# Altium PCB EMIA_HM1521_NETLIST_V1.0.pcbdoc (part 1 of 2)
Units mm, origin at the board's own origin, x right, y up, seen from the top; angles counter-clockwise.
Board outline 118 x 84.09 mm, 2 copper layers (Top Layer, Bottom Layer), stack 0.972 mm thick; 201 components, 147 nets, 642 pads, 379 vias.
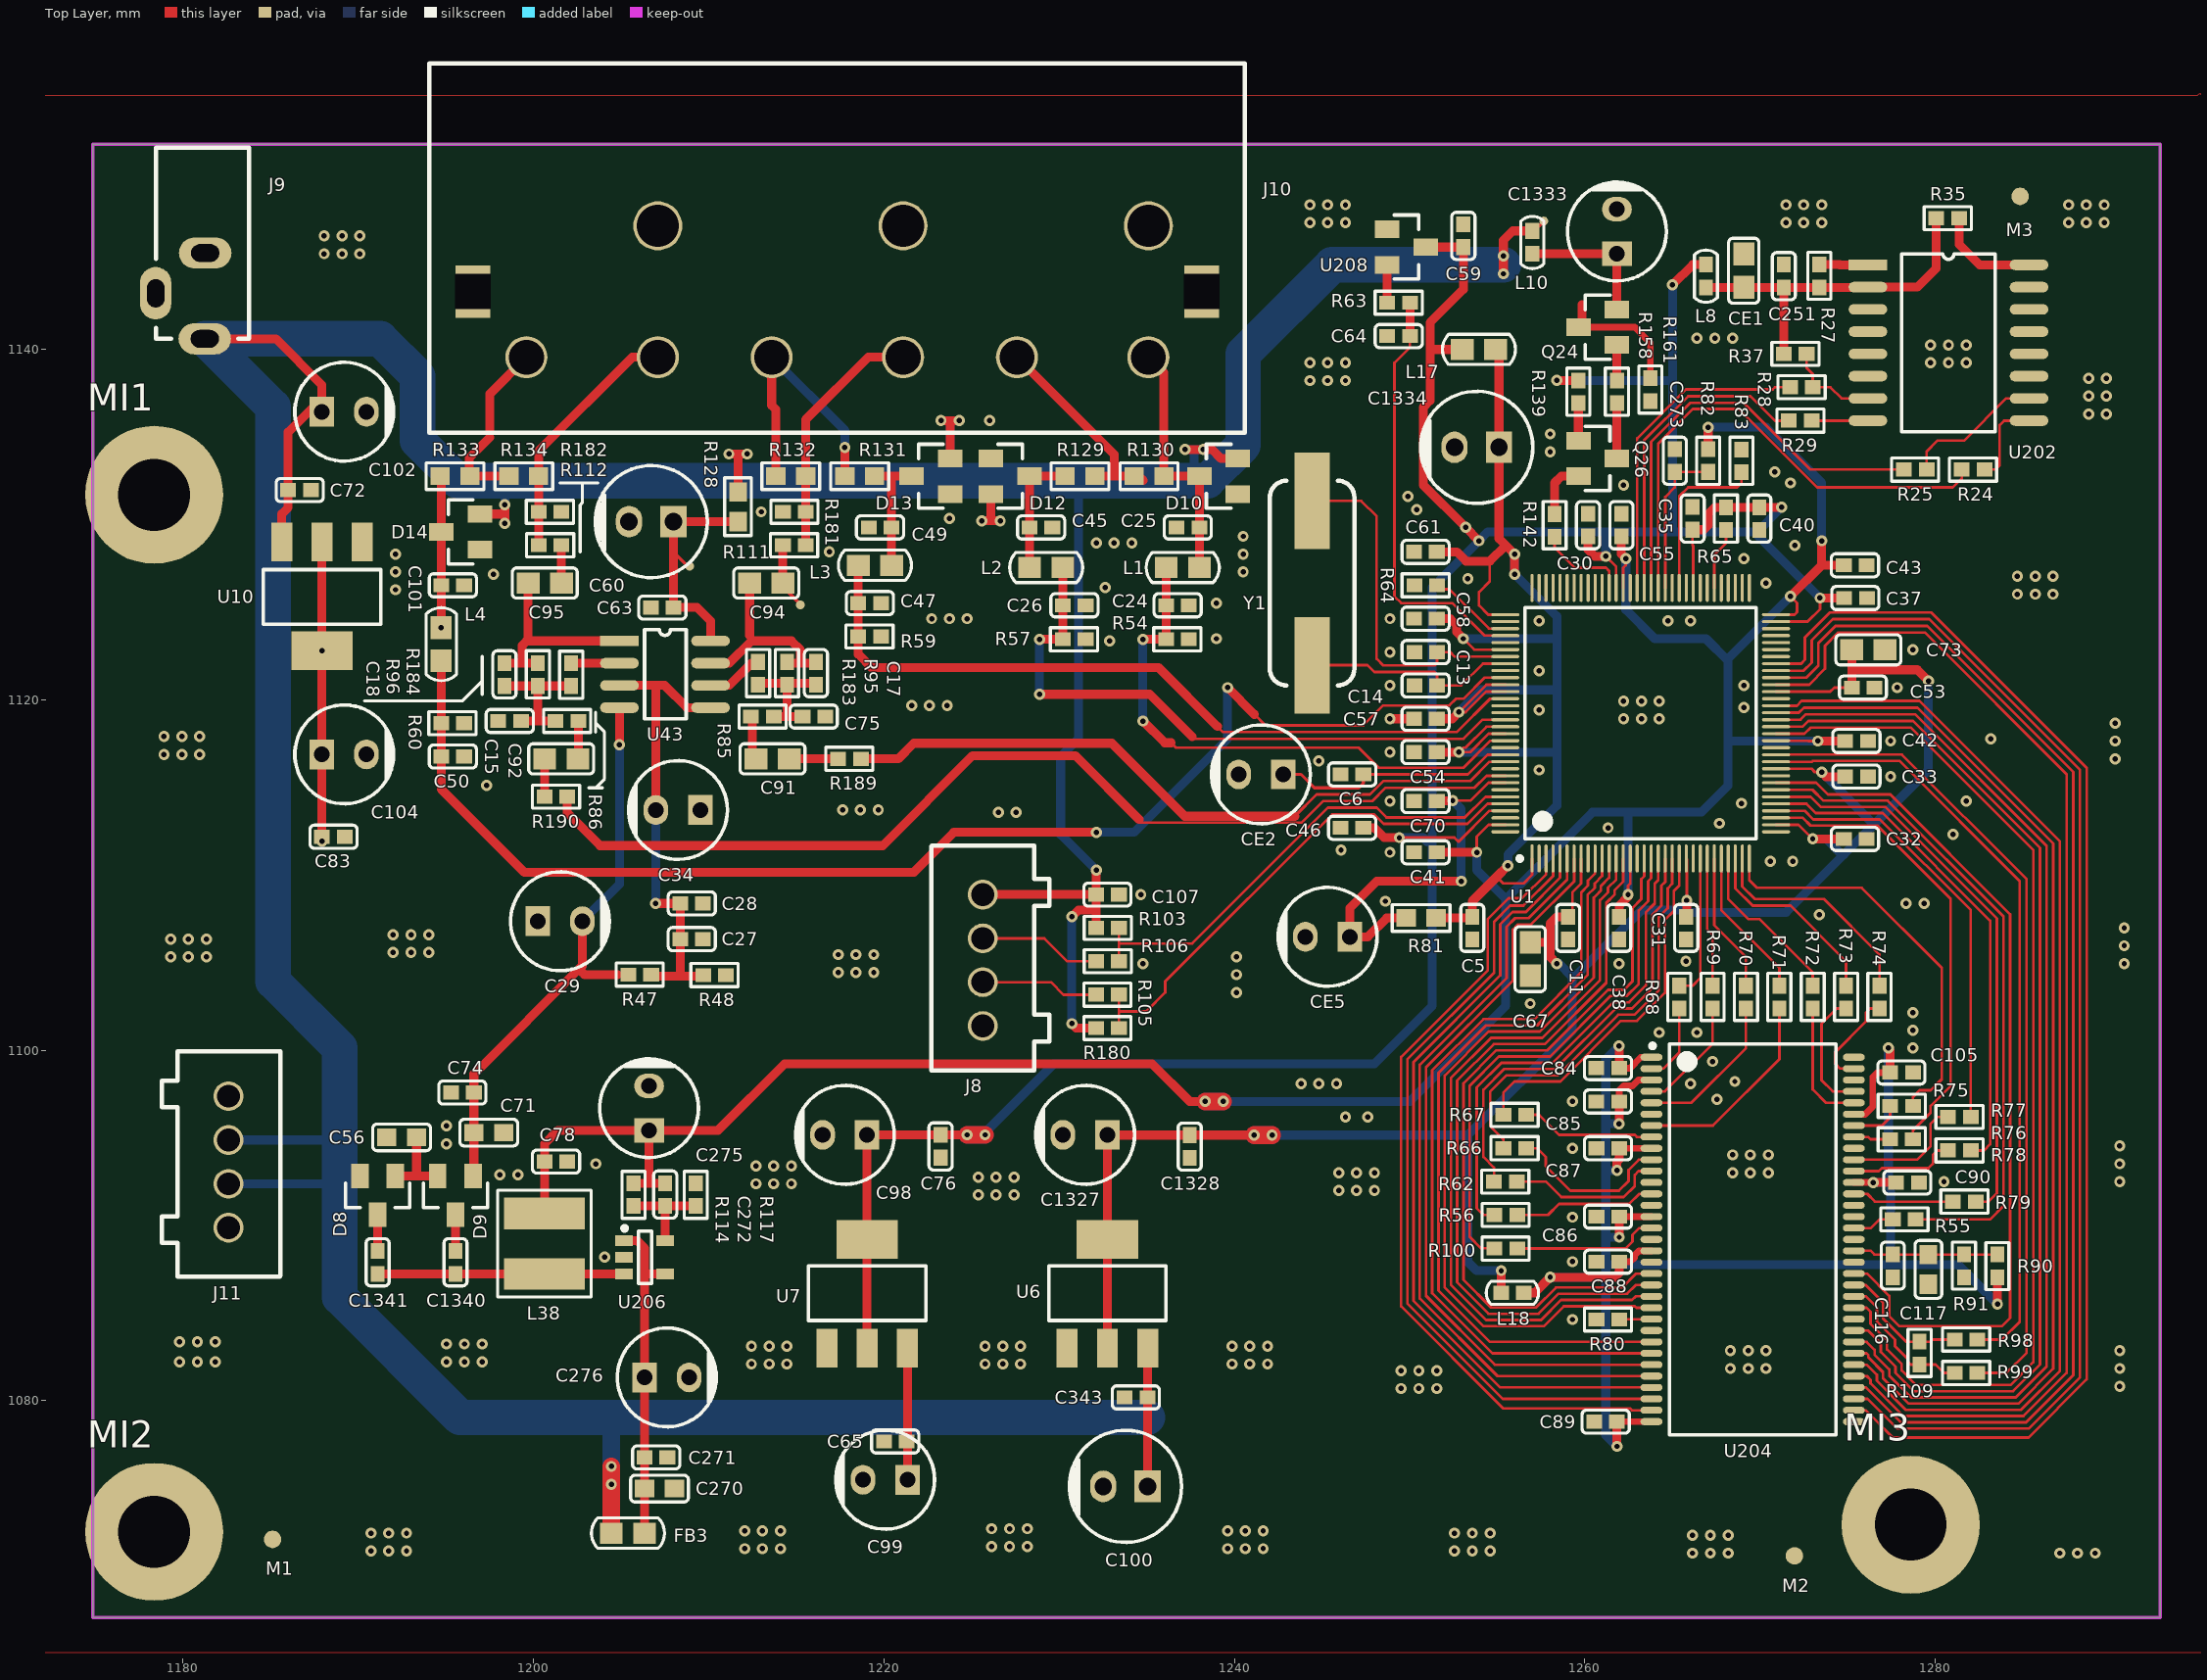
[diagram p0: Top Layer view]
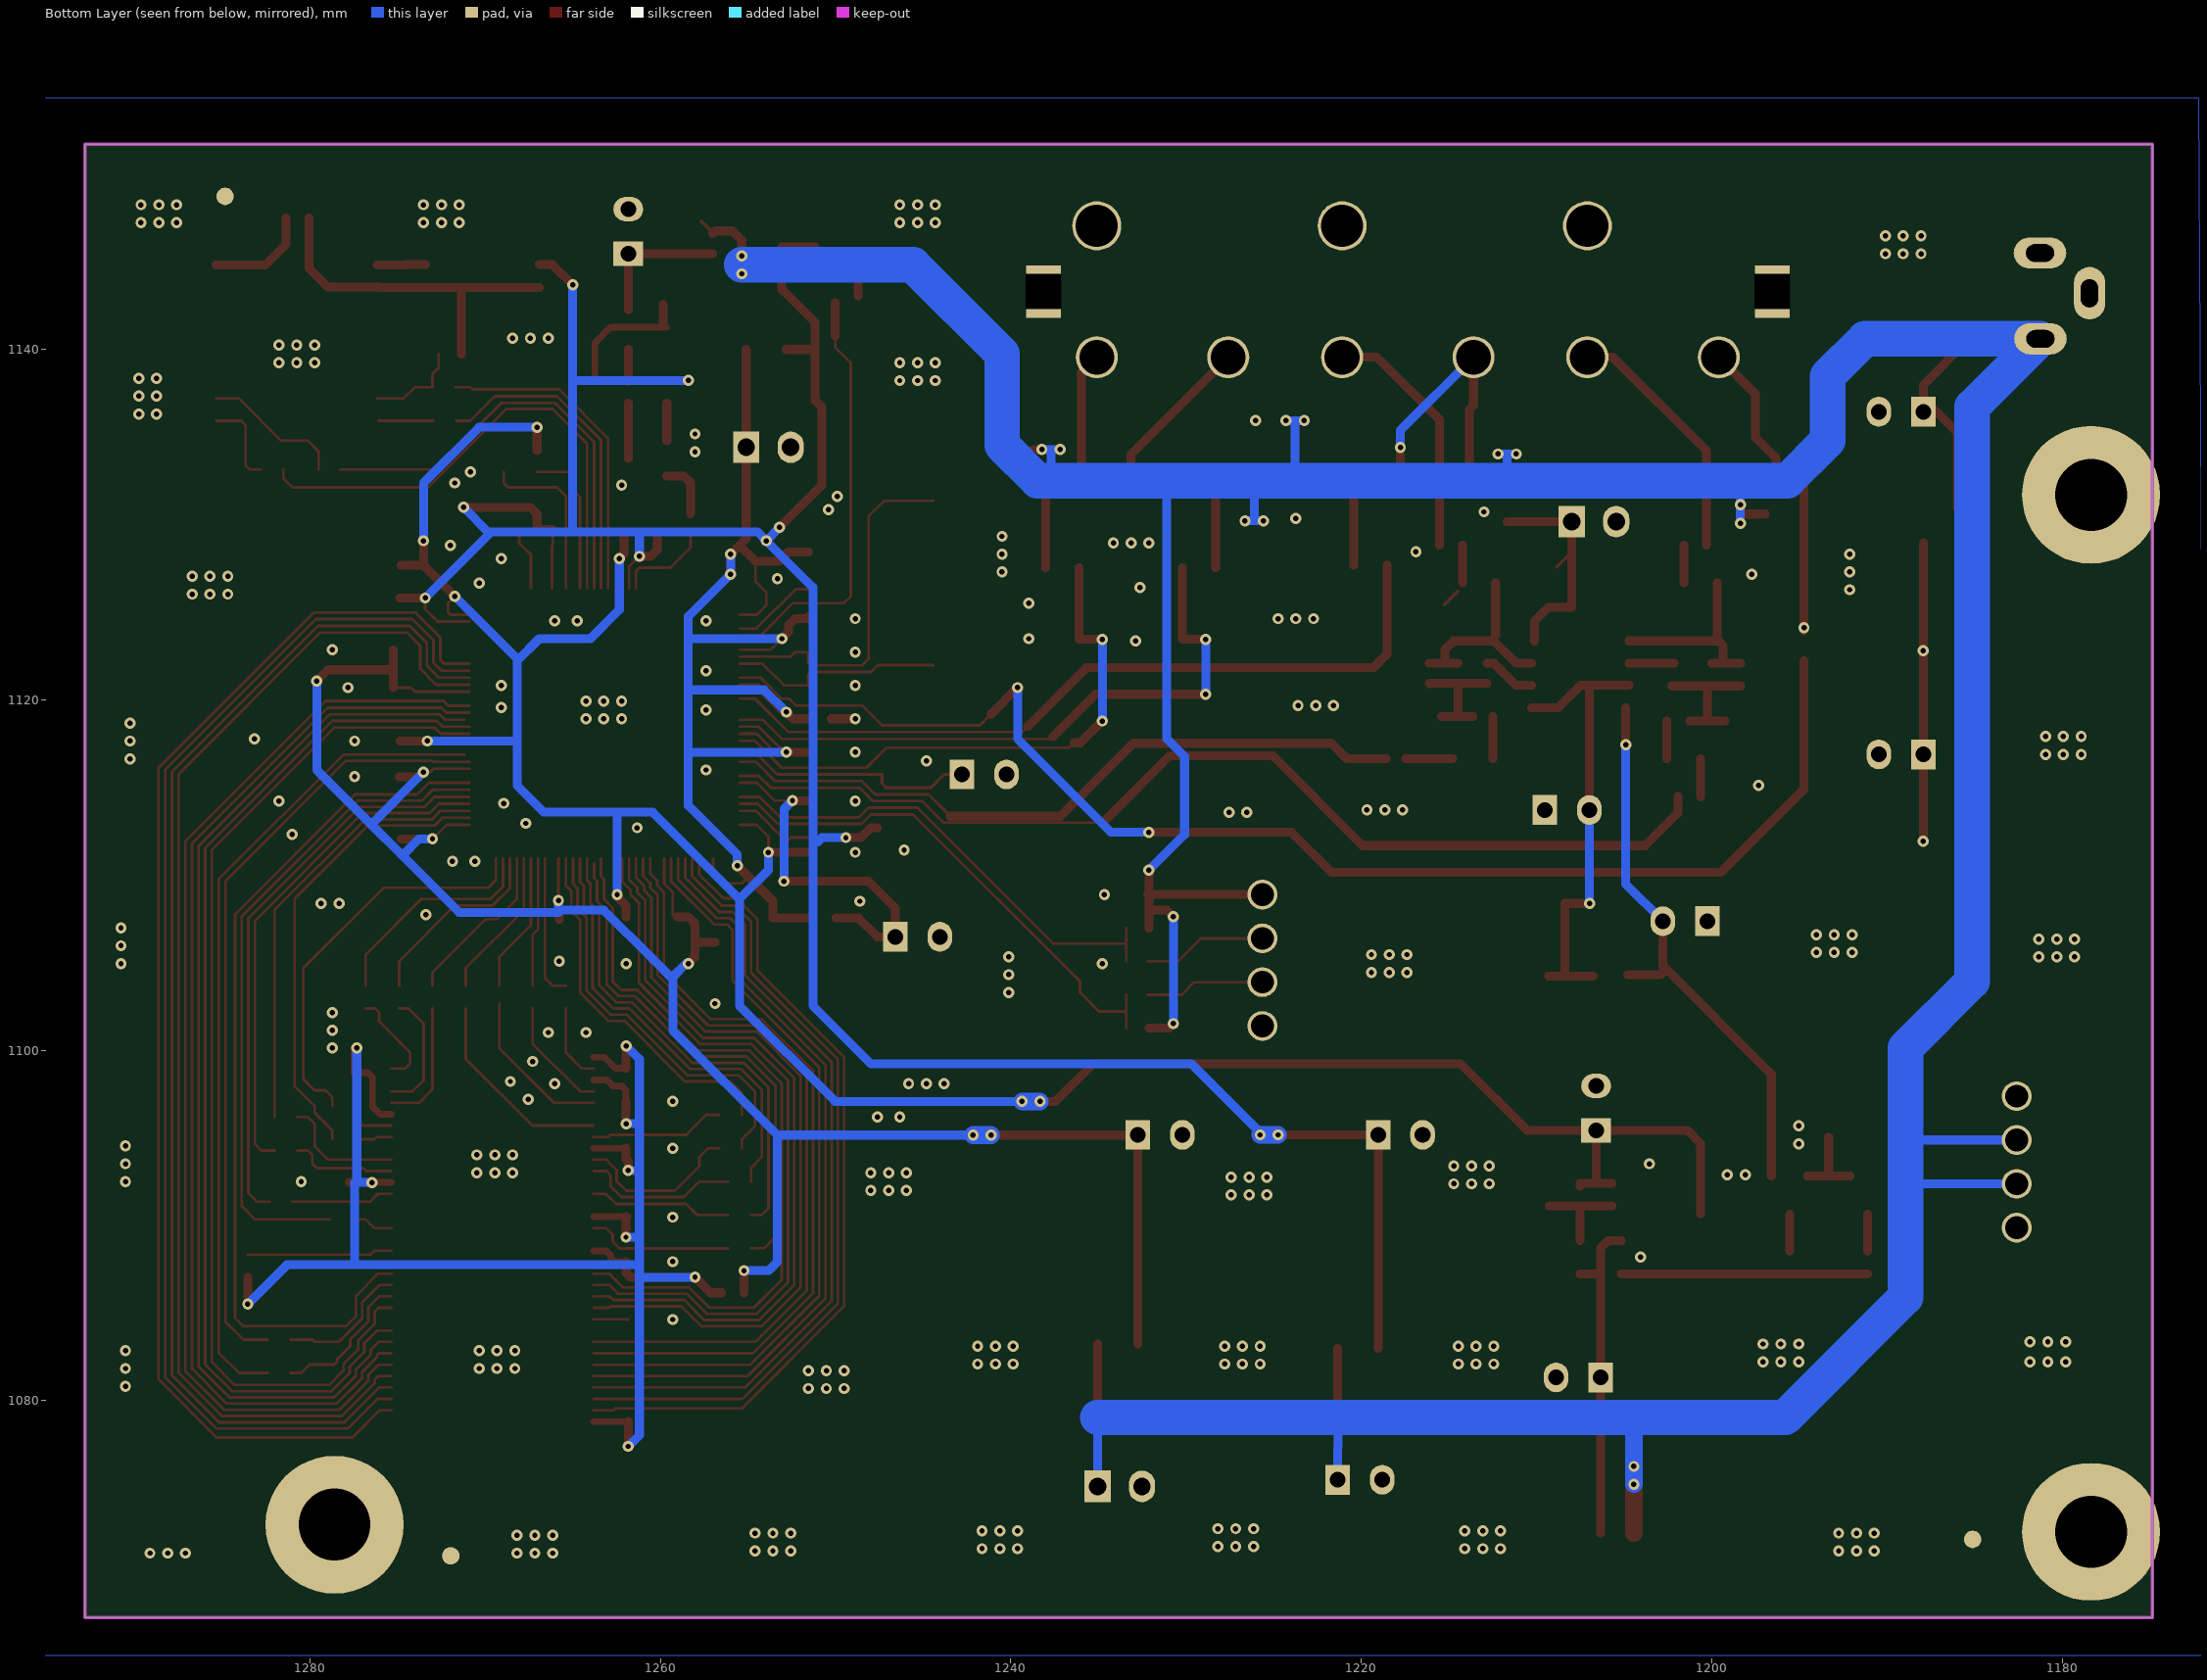
[diagram p1: Bottom Layer view, seen from below]

## Layer stack, top to bottom
Top Layer: signal copper 0.0356
Dielectric: dielectric 0.9004, FR-4, Dk 4.8
Bottom Layer: signal copper 0.0356

## Board outline
1174.844,1067.61 1174.844,1151.704 1292.844,1151.704 1292.844,1067.61

## Design rules (kind name [scope] priority, off if disabled: settings)
AssemblyTestPointUsage [All] p0 off: scope1count=1 scope1_0_kind=Board scope1_0_value=Board scope2count=1 scope2_0_kind=Board scope2_0_value=Board commentlength=0
AssemblyTestPointUsage [All] p1 off:
AssemblyTestpoint [All] p0 off: scope1count=1 scope1_0_kind=Board scope1_0_value=Board scope2count=1 scope2_0_kind=Board scope2_0_value=Board commentlength=0
AssemblyTestpoint [All] p1 off: testpointundercomponent=TRUE minsize=1.016 maxsize=2.54 preferedsize=1.524 minholesize=0 maxholesize=1.016 preferedholesize=0.813 testpointgrid=0.025 usegrid=TRUE gridtolerance=0 allowsidetop=TRUE allowsidebottom=TRUE
Clearance [All] p0 off: scope1count=1 scope1_0_kind=Board scope1_0_value=Board scope2count=1 scope2_0_kind=Board scope2_0_value=Board commentlength=48 gap=0.203 // Protel DXP Scope 1 Expression Was: InPolygon
Clearance Clearance_1 [All] p0: scope1count=1 scope1_0_kind=Board scope1_0_value=Board scope2count=1 scope2_0_kind=Board scope2_0_value=Board commentlength=0 gap=0.254
Clearance Clearance_1 [All] p1: gap=0.254
Clearance [InPolygon] p2 off: gap=0.203
ComponentClearance [All] p0 off: scope1count=1 scope1_0_kind=Board scope1_0_value=Board scope2count=1 scope2_0_kind=Board scope2_0_value=Board commentlength=0 gap=0.254 collisioncheckmode=3
ComponentClearance [All] p1 off: gap=0.254 collisioncheckmode=3 verticalgap=0.254 showdistances=FALSE
DiffPairsRouting [All] p0 off: scope1count=1 scope1_0_kind=Board scope1_0_value=Board scope2count=1 scope2_0_kind=Board scope2_0_value=Board commentlength=0
DiffPairsRouting [All] p1 off: maxlimit=0.381 minlimit=0.025 mostfreqgap=0.025 maxuncoupledlength=12.7
FabricationTestPointUsage [All] p0 off: scope1count=1 scope1_0_kind=Board scope1_0_value=Board scope2count=1 scope2_0_kind=Board scope2_0_value=Board commentlength=0 valid=0 allowmultiple=FALSE
FabricationTestPointUsage [All] p1 off: valid=0 allowmultiple=FALSE
FabricationTestpoint [All] p0 off: scope1count=1 scope1_0_kind=Board scope1_0_value=Board scope2count=1 scope2_0_kind=Board scope2_0_value=Board commentlength=0 side=3 testpointundercomponent=TRUE minsize=1.016 maxsize=2.54 preferedsize=1.524 minholesize=0 maxholesize=1.016 preferedholesize=0.813 testpointgrid=0.025
FabricationTestpoint [All] p1 off: side=3 testpointundercomponent=TRUE minsize=1.016 maxsize=2.54 preferedsize=1.524 minholesize=0 maxholesize=1.016 preferedholesize=0.813 testpointgrid=0.025 allowsidetop=TRUE allowsidebottom=TRUE usegrid=TRUE gridtolerance=0
FanoutControl Fanout_Default [All] p0 off: scope1count=1 scope1_0_kind=Board scope1_0_value=Board scope2count=1 scope2_0_kind=Board scope2_0_value=Board commentlength=30 // Fanout_Default (Default Rule)
FanoutControl Fanout_Small [All] p0 off: scope1count=1 scope1_0_kind=Board scope1_0_value=Board scope2count=1 scope2_0_kind=Board scope2_0_value=Board commentlength=84 // Protel DXP Scope 1 Expression Was: (CompPinCount < 5)   Fanout_Small (Default Rule)
FanoutControl Fanout_SOIC [All] p0 off: scope1count=1 scope1_0_kind=Board scope1_0_value=Board scope2count=1 scope2_0_kind=Board scope2_0_value=Board commentlength=71 // Protel DXP Scope 1 Expression Was: IsSOIC   Fanout_SOIC (Default Rule)
FanoutControl Fanout_LCC [All] p0 off: scope1count=1 scope1_0_kind=Board scope1_0_value=Board scope2count=1 scope2_0_kind=Board scope2_0_value=Board commentlength=69 // Protel DXP Scope 1 Expression Was: IsLCC   Fanout_LCC (Default Rule)
FanoutControl Fanout_BGA [All] p0 off: scope1count=1 scope1_0_kind=Board scope1_0_value=Board scope2count=1 scope2_0_kind=Board scope2_0_value=Board commentlength=69 // Protel DXP Scope 1 Expression Was: IsBGA   Fanout_BGA (Default Rule)
FanoutControl Fanout_BGA [IsBGA] p1 off: bgadir=Out bgaviamode=Centered fanoutstyle=Auto fanoutdirection=Alternating viagrid=0.025 // Fanout_BGA (Default Rule)
FanoutControl Fanout_LCC [IsLCC] p2 off: bgadir=Out bgaviamode=Centered fanoutstyle=Auto fanoutdirection=Alternating viagrid=0.025 // Fanout_LCC (Default Rule)
FanoutControl Fanout_SOIC [IsSOIC] p3 off: bgadir=Out bgaviamode=Centered fanoutstyle=Auto fanoutdirection=Alternating viagrid=0.025 // Fanout_SOIC (Default Rule)
FanoutControl Fanout_Small [(CompPinCount < 5)] p4 off: bgadir=Out bgaviamode=Centered fanoutstyle=Auto fanoutdirection=OutThenIn viagrid=0.025 // Fanout_Small (Default Rule)
FanoutControl Fanout_Default [All] p5 off: bgadir=Out bgaviamode=Centered fanoutstyle=Auto fanoutdirection=Alternating viagrid=0.025 // Fanout_Default (Default Rule)
Height [All] p0 off: scope1count=1 scope1_0_kind=Board scope1_0_value=Board scope2count=1 scope2_0_kind=Board scope2_0_value=Board commentlength=0
Height [All] p1 off: minheight=0 maxheight=25.4 prefheight=12.7
HoleSize [All] p0 off: scope1count=1 scope1_0_kind=Board scope1_0_value=Board scope2count=1 scope2_0_kind=Board scope2_0_value=Board commentlength=0 absolutevalues=TRUE maxlimit=5.08 minlimit=0.254 maxpercent=80.000 minpercent=20.000
HoleSize [All] p1 off: absolutevalues=TRUE maxlimit=5.08 minlimit=0.254 maxpercent=80.000 minpercent=20.000
HoleToHoleClearance [All] p0 off: scope1count=1 scope1_0_kind=Board scope1_0_value=Board scope2count=1 scope2_0_kind=Board scope2_0_value=Board commentlength=0
HoleToHoleClearance [All] p1 off: gap=0.254 allowstackedmicrovias=TRUE
LayerPairs [All] p0 off: scope1count=1 scope1_0_kind=Board scope1_0_value=Board scope2count=1 scope2_0_kind=Board scope2_0_value=Board commentlength=0 enforce=TRUE
LayerPairs [All] p1 off: enforce=TRUE
MinimumSolderMaskSliver [All] p0 off: scope1count=1 scope1_0_kind=Board scope1_0_value=Board scope2count=1 scope2_0_kind=Board scope2_0_value=Board commentlength=0
MinimumSolderMaskSliver [All] p1 off: minsoldermaskwidth=0.013
NetAntennae [All] p0 off: scope1count=1 scope1_0_kind=Board scope1_0_value=Board scope2count=1 scope2_0_kind=Board scope2_0_value=Board commentlength=0
NetAntennae [All] p1 off: netantennaetolerance=0
PasteMaskExpansion [All] p0 off: scope1count=1 scope1_0_kind=Board scope1_0_value=Board scope2count=1 scope2_0_kind=Board scope2_0_value=Board commentlength=0 expansion=0
PasteMaskExpansion [All] p1 off: expansion=0
PlaneClearance [All] p0 off: scope1count=1 scope1_0_kind=Board scope1_0_value=Board scope2count=1 scope2_0_kind=Board scope2_0_value=Board commentlength=0 clearance=0.508
PlaneClearance [All] p1 off: clearance=0.508
PlaneConnect [All] p0 off: scope1count=1 scope1_0_kind=Board scope1_0_value=Board scope2count=1 scope2_0_kind=Board scope2_0_value=Board commentlength=0 planeconnectstyle=Direct reliefexpansion=0.508 reliefentries=4 reliefconductorwidth=0.254 reliefairgap=0.254
PlaneConnect [All] p1 off: planeconnectstyle=Direct reliefexpansion=0.508 reliefentries=4 reliefconductorwidth=0.254 reliefairgap=0.254
PolygonConnect [All] p0 off: scope1count=1 scope1_0_kind=Board scope1_0_value=Board scope2count=1 scope2_0_kind=Board scope2_0_value=Board commentlength=0 connectstyle=Direct reliefconductorwidth=0.254 reliefentries=4 polygonreliefangle="90 Angle"
PolygonConnect [All] p1 off: connectstyle=Direct reliefconductorwidth=0.254 reliefentries=4 polygonreliefangle="90 Angle"
RoutingCorners [All] p0 off: scope1count=1 scope1_0_kind=Board scope1_0_value=Board scope2count=1 scope2_0_kind=Board scope2_0_value=Board commentlength=0 cornerstyle=45-Degree minsetback=2.54 maxsetback=2.54
RoutingCorners [All] p1 off: cornerstyle=45-Degree minsetback=2.54 maxsetback=2.54
RoutingLayers [All] p0 off: scope1count=1 scope1_0_kind=Board scope1_0_value=Board scope2count=1 scope2_0_kind=Board scope2_0_value=Board commentlength=0 top layer=Automatic bottom layer=Automatic
RoutingLayers [All] p1 off: top layer_v5=TRUE bottom layer_v5=TRUE
RoutingPriority [All] p0 off: scope1count=1 scope1_0_kind=Board scope1_0_value=Board scope2count=1 scope2_0_kind=Board scope2_0_value=Board commentlength=0
RoutingPriority [All] p1 off: routingpriority=0
RoutingTopology [All] p0 off: scope1count=1 scope1_0_kind=Board scope1_0_value=Board scope2count=1 scope2_0_kind=Board scope2_0_value=Board commentlength=0 topology=Shortest
RoutingTopology [All] p1 off: topology=Shortest
RoutingVias [All] p0 off: scope1count=1 scope1_0_kind=Board scope1_0_value=Board scope2count=1 scope2_0_kind=Board scope2_0_value=Board commentlength=0 holewidth=0.305 width=0.635 viastyle="Through Hole" minholewidth=0.305 minwidth=0.635 maxholewidth=0.305 maxwidth=0.635
RoutingVias [All] p1 off: holewidth=0.305 width=0.635 viastyle="Through Hole" minholewidth=0.305 minwidth=0.635 maxholewidth=0.305 maxwidth=0.635
SMDNeckDown [All] p0 off: scope1count=1 scope1_0_kind=Board scope1_0_value=Board scope2count=1 scope2_0_kind=Board scope2_0_value=Board commentlength=0 percent=100.000
SMDNeckDown [All] p1 off: percent=100.000
ShortCircuit [All] p0 off: scope1count=1 scope1_0_kind=Board scope1_0_value=Board scope2count=1 scope2_0_kind=Board scope2_0_value=Board commentlength=0 allowed=FALSE
ShortCircuit [All] p1 off: allowed=FALSE
SilkToSilkClearance [All] p0 off: scope1count=1 scope1_0_kind=Board scope1_0_value=Board scope2count=1 scope2_0_kind=Board scope2_0_value=Board commentlength=0
SilkToSilkClearance [All] p1 off: silktosilkclearance=0.152
SilkscreenOverComponentPads [All] p0: scope1count=1 scope1_0_kind=Board scope1_0_value=Board scope2count=1 scope2_0_kind=Board scope2_0_value=Board commentlength=0
SilkscreenOverComponentPads [All] p1: minsilkscreentomaskgap=0.254
SolderMaskExpansion [All] p0 off: scope1count=1 scope1_0_kind=Board scope1_0_value=Board scope2count=1 scope2_0_kind=Board scope2_0_value=Board commentlength=0 expansion=0.102
SolderMaskExpansion [All] p1 off: expansion=0.102
UnRoutedNet [All] p0 off: scope1count=1 scope1_0_kind=Board scope1_0_value=Board scope2count=1 scope2_0_kind=Board scope2_0_value=Board commentlength=0
UnRoutedNet [All] p1 off:
Width Width_def [All] p0 off: scope1count=1 scope1_0_kind=Board scope1_0_value=Board scope2count=1 scope2_0_kind=Board scope2_0_value=Board commentlength=0 maxlimit=0.508 minlimit=0.025 preferedwidth=0.152
Width Width_pwr [All] p0 off: scope1count=1 scope1_0_kind=Board scope1_0_value=Board scope2count=1 scope2_0_kind=Board scope2_0_value=Board commentlength=256 maxlimit=2.54 minlimit=0.025 preferedwidth=0.381 // Protel DXP Scope 1 Expression Was: InNet('5V') OR InNet('5VA') OR InNet('A3V3') OR InNet('A3V3_AUDIO') OR InNet('D1V2') OR InNet('D2V5')  OR InNet('D3V3') OR InNet('D3V3_T') OR InNet('PWR_DRAM') OR InNet('SC_VCCEN') OR InNet('SFVCC') OR InNet('SC_VCC')
Width Width_pwr [InNet('5V') OR InNet('5VA') OR InNet('A3V3') OR InNet('A3V3_AUDIO') OR InNet('D1V2') OR InNet('D2V5')  OR InNet('D3V3') OR InNet('D3V3_T') OR InNet('PWR_DRAM') OR InNet('SC_VCCEN') OR InNet('SFVCC') OR InNet('SC_VCC')] p1 off: maxlimit=2.54 minlimit=0.025 preferedwidth=0.381 minimp=50.000000 maximp=50.000000 favimp=50.000000
Width Width_def [All] p2 off: maxlimit=0.508 minlimit=0.025 preferedwidth=0.152 minimp=50.000000 maximp=50.000000 favimp=50.000000

## Classes and differential pairs
net class "Signle Nets": 1P2AO /SYS_RST A_L A_R AUL AUR CVBS DDR_A0 DDR_A1 DDR_A2 DDR_A3 DDR_A4 DDR_A5 DDR_A6 DDR_A7 DDR_A8 DDR_A9 DDR_A10 DDR_A11 DDR_A12 DDR_BA0 DDR_BA1 DDR_CAS DDR_CKE DDR_CKN DDR_CKP DDR_D0 DDR_D1 DDR_D2 DDR_D3 DDR_D4 DDR_D5 DDR_D6 DDR_D7 DDR_D8 DDR_D9 DDR_D10 DDR_D11 DDR_D12 DDR_D13 DDR_D14 DDR_D15 DDR_DM0 DDR_DM1 DDR_DQS0 DDR_DQS1 DDR_RAS DDR_WE DR_CKN DR_CKP DR_D0 DR_D1 DR_D2 DR_D3 DR_D4 DR_D5 DR_D6 DR_D7 DR_D8 DR_D9 DR_D10 DR_D11 DR_D12 DR_D13 DR_D14 DR_D15 DR_DQS0 DR_DQS1 GPIO14 NetC6_2 NetC13_1 NetC14_1 NetC15_2 NetC17_1 NetC17_2 NetC18_2 NetC56_1 NetC91_1 NetC91_2 NetC92_1 NetC92_2 NetC94_2 NetC95_2 NetC116_2 NetC270_1 NetC272_1 NetC1333_1 NetC1340_1 NetC1340_2 NetC1341_2 NetJ8_2 NetJ8_3 NetJ10_1 NetJ10_4 NetJ10_7 NetQ24_1 NetQ26_1 NetQ26_2 NetQ26_3 NetR63_1 NetR64_1 NetR80_2 NetR83_1 NetR183_2 NetR184_1 Pb Pr RXD S_/CS S_CLK S_SI S_SO SC_CLK SC_DETECT SC_IO SC_RST SC_VCC SCL SDA SFCLK SFCS SFHOLD SFSI SFSO SFVCC SFWP SPI1_CLK SPI1_IO0 TXD V_DAC0 V_DAC1 V_DAC2 V_DAC3 Vref Y

## Components (designator, comment, footprint, x,y, rotation, side; value= is the part's Value field where it differs from the comment)
C5 "Cap" 0402C 1253.584,1106.98 r90 top
C6 "Cap" 0402C 1246.726,1115.743 r0 top
C11 "Cap" 0402C 1259.045,1106.98 r90 top
C13 "Cap" 0402C 1250.917,1122.728 r180 top
C14 "Cap" 0402C 1250.917,1120.823 r180 top
C15 "Cap" 0402C 1198.643,1118.791 r0 top
C17 "Cap" 0402C 1216.119,1121.522 r90 top
C18 "Cap" 0402C 1198.339,1121.453 r90 top
C24 "Cap" 0402C 1236.766,1125.395 r0 top
C25 "Cap" 0402C 1237.345,1129.84 r180 top
C26 "Cap" 0402C 1230.871,1125.395 r0 top
C27 "Cap" 0402C 1209.032,1106.345 r0 top
C28 "Cap" 0402C 1209.032,1108.377 r0 top
C29 "Cap" SD1C107M05011BB 1201.514,1107.361 r0 top
C30 "Cap" 0402C 1260.188,1129.967 r270 top
C31 "Cap" 0402C 1265.795,1106.98 r90 top
C32 "Cap" 0402C 1275.428,1112.06 r180 top
C33 "Cap" 0402C 1275.51,1115.616 r180 top
C34 "Cap" SD1C107M05011BB 1208.245,1113.711 r180 top
C35 "Cap" 0402C 1266.157,1130.348 r270 top
C37 "Cap" 0402C 1275.449,1125.812 r180 top
C38 "Cap" 0402C 1261.966,1106.98 r90 top
C40 "Cap" 0402C 1269.967,1130.348 r90 top
C41 "Cap" 0402C 1250.917,1111.298 r0 top
C42 "Cap" 0402C 1275.51,1117.648 r180 top
C43 "Cap" 0402C 1275.428,1127.681 r180 top
C45 "Cap" 0402C 1228.971,1129.84 r0 top
C46 "Cap" 0402C 1246.726,1112.695 r0 top
C47 "Cap" 0402C 1219.197,1125.522 r0 top
C49 "Cap" 0402C 1219.776,1129.84 r180 top
C50 "Cap" 0402C 1195.394,1116.764 r0 top
C53 "Cap" 0402C 1275.879,1120.696 r180 top
C54 "Cap" 0402C 1250.917,1117.013 r0 top
C55 "Cap" 0402C 1262.093,1129.967 r270 top
C56 "Cap" 0603C 1192.472,1095.026 r180 top
C57 "Cap" 0402C 1250.917,1118.918 r0 top
C58 "Cap" 0402C 1250.917,1124.633 r0 top
C59 "Cap" 0402C 1253.076,1146.482 r270 top
C60 "Cap" SD1C227M6L011BB 1206.721,1130.171 r180 top
C61 "Cap" 0402C 1250.917,1128.443 r0 top
C63 "Cap" 0402C 1207.353,1125.268 r0 top
C64 "Cap" 0402C 1249.386,1140.762 r0 top
C65 "Cap" 0402C 1220.64,1077.668 r180 top
C67 "Cap" 0805C 1256.886,1105.202 r90 top
C70 "Cap" 0402C 1250.917,1114.219 r0 top
C71 "Cap" 0603C 1197.445,1095.296 r0 top
C72 "Cap" 0402C 1186.655,1131.974 r0 top
C73 "Cap" 0805C 1276.19,1122.855 r180 top
C74 "Cap" 0402C 1195.934,1097.582 r180 top
C75 "Cap" 0402C 1215.992,1119.045 r180 top
C76 "Cap" 0402C 1223.231,1094.509 r270 top
C78 "Cap" 0402C 1201.285,1093.645 r0 top
C83 "Cap" 0402C 1188.585,1112.187 r0 top
C84 "Cap" 0402C 1261.326,1098.979 r0 top
C85 "Cap" 0402C 1261.326,1097.074 r0 top
C86 "Cap" 0402C 1261.331,1090.5 r0 top
C87 "Cap" 0402C 1261.331,1094.407 r0 top
C88 "Cap" 0402C 1261.331,1087.93 r0 top
C89 "Cap" 0402C 1261.199,1078.8 r0 top
C90 "Cap" 0402C 1278.412,1092.45 r180 top
C91 "Cap" 0805C 1213.642,1116.632 r180 top
C92 "Cap" 0805C 1201.58,1116.632 r0 top
C94 "Cap" 0805C 1213.283,1126.665 r0 top
C95 "Cap" 0805C 1200.643,1126.665 r0 top
C98 "Cap" SD1C107M05011BB 1217.77,1095.169 r180 top
C99 "Cap" SD1C107M05011BB 1220.07,1075.484 r180 top
C100 "Cap" SD1C227M6L011BB 1233.786,1075.105 r180 top
C101 "Cap" 0402C 1195.394,1126.538 r0 top
C102 "Cap" SD1C107M05011BB 1189.195,1136.444 r0 top
C104 "Cap" SD1C107M05011BB 1189.195,1116.886 r0 top
C105 "Cap" 0402C 1278.074,1098.725 r180 top
C107 "Cap" 0402C 1232.756,1108.885 r180 top
C116 "Cap" 0402C 1277.587,1087.701 r90 top
C117 "Cap" 0603C 1279.619,1087.491 r90 top
C251 "Cap" 0402C 1271.364,1144.183 r270 top
C270 "Cap" 0603C 1207.19,1074.976 r0 top
C271 "Cap" 0402C 1207,1076.754 r0 top
C272 "Cap" 0402C 1207.515,1091.765 r90 top
C273 "Cap" 0402C 1265.141,1133.65 r270 top
C275 "Cap" SD1C107M05011BB 1206.594,1096.693 r90 top
C276 "Cap" SD1C107M05011BB 1207.61,1081.326 r0 top
C343 "Cap" 0402C 1234.381,1080.183 r180 top
C1327 "Cap" SD1C107M05011BB 1231.486,1095.169 r180 top
C1328 "Cap" 0402C 1237.455,1094.495 r270 top
C1333 "Cap" SD1C107M05011BB 1261.839,1146.731 r90 top
C1334 "Cap" SD1C227M6L011BB 1253.838,1134.412 r180 top
C1340 "Cap" 0402C 1195.545,1087.894 r90 top
C1341 "Cap" 0402C 1191.1,1087.894 r90 top
CE1 "Cap" 0805C 1269.078,1144.493 r90 top
CE2 "Cap" SD1C107M05011BB 1241.519,1115.743 r180 top
CE5 "Cap" SD1C107M05011BB 1245.329,1106.472 r180 top
D8 "D_Diode" BAT54S(SOT23) 1191.1,1091.724 r270 top
D9 "D_Diode" BAT54S(SOT23) 1195.545,1091.724 r270 top
D10 "D_Diode" BAT54S(SOT23) 1239.106,1132.761 r180 top
D12 "D_Diode" BAT54S(SOT23) 1227.211,1132.761 r0 top
D13 "D_Diode" BAT54S(SOT23) 1222.68,1132.761 r180 top
D14 "D_Diode" BAT54S(SOT23) 1195.834,1129.586 r180 top
FB3 "Inductor" 0805L 1205.39,1072.436 r0 top
J8 "4_HEADER" TJC3-4P 1225.644,1101.385 r90 top
J9 "POWER_SOCKET" DC插座 1181.234,1140.604 r270 top
J10 "RCA6" AVLP-23-6A-0A102 1199.594,1147.054 r180 top
J11 "4_HEADER" TJC3-4P 1182.591,1097.375 r270 top
L1 "Inductor" 0805L 1237.056,1127.554 r0 top
L2 "Inductor" 0805L 1229.261,1127.554 r180 top
L3 "Inductor" 0805L 1219.487,1127.681 r0 top
L4 "Inductor" 0805L 1194.734,1123.175 r90 top
L8 "Inductor" 0402L 1266.919,1144.183 r270 top
L10 "Inductor" 0402L 1257.013,1146.101 r270 top
L17 "Inductor" 0805L 1253.965,1140 r0 top
L18 "Inductor" 0402L 1255.87,1086.152 r180 top
L38 "Inductor" PIO43-2R2MB 1200.625,1088.959 r90 top
M1 "1-MARKFA" MARK 1185.105,1072.08 r0 top
M2 "1-MARKFA" MARK 1271.973,1071.141 r0 top
M3 "1-MARKFA" MARK 1284.851,1148.738 r0 top
MI1 "" Screw-R7.8 1178.4,1131.466 r0 top
MI2 "" Screw-R7.8 1178.4,1072.276 r0 top
MI3 "" Screw-R7.8 1278.66,1072.686 r0 top
Q24 "PNP(123-BEC)" 2SB1197K-SOT23 1260.739,1141.27 r180 top
Q26 "NPN(123-BEC)" PMBT3904-SOT23 1260.739,1133.777 r0 top
R24 "Res1" 0402R 1282.163,1133.142 r180 top
R25 "Res1" 0402R 1278.857,1133.142 r180 top
R27 "Res1" 0402R 1273.396,1144.204 r90 top
R28 "Res1" 0402R 1272.38,1137.841 r0 top
R29 "Res1" 0402R 1272.316,1135.936 r0 top
R35 "Res1" 0402R 1280.724,1147.493 r0 top
R37 "Res1" 0402R 1272.024,1139.746 r0 top
R47 "Res1" 0402R 1206.056,1104.313 r180 top
R48 "Res1" 0402R 1210.327,1104.288 r180 top
R54 "Res1" 0402R 1236.745,1123.457 r180 top
R55 "Res1" 0402R 1278.247,1090.343 r0 top
R56 "Res1" 0402R 1255.489,1090.597 r180 top
R57 "Res1" 0402R 1230.85,1123.457 r180 top
R59 "Res1" 0402R 1219.176,1123.617 r180 top
R60 "Res1" 0402R 1195.373,1118.669 r180 top
R62 "Res1" 0402R 1255.463,1092.502 r180 top
R63 "Res1" 0402R 1249.386,1142.667 r0 top
R64 "Res1" 0402R 1250.917,1126.538 r180 top
R65 "Res1" 0402R 1268.062,1130.348 r90 top
R66 "Res1" 0402R 1255.997,1094.407 r180 top
R67 "Res1" 0402R 1255.997,1096.312 r180 top
R68 "Res1" 0402R 1265.395,1103.043 r90 top
R69 "Res1" 0402R 1267.3,1103.043 r90 top
R70 "Res1" 0402R 1269.205,1103.043 r90 top
R71 "Res1" 0402R 1271.11,1103.043 r90 top
R72 "Res1" 0402R 1273.015,1103.043 r90 top
R73 "Res1" 0402R 1274.92,1103.043 r90 top
R74 "Res1" 0402R 1276.825,1103.043 r90 top
R75 "Res1" 0402R 1278.095,1096.82 r0 top
R76 "Res1" 0402R 1278.09,1094.915 r0 top
R77 "Res1" 0402R 1281.397,1096.185 r0 top
R78 "Res1" 0402R 1281.397,1094.28 r0 top
R79 "Res1" 0402R 1281.676,1091.359 r0 top
R80 "Res1" 0402R 1261.331,1084.628 r0 top
R81 "Res1" 0603R 1250.663,1107.551 r180 top
R82 "Res1" 0402R 1267.046,1133.65 r270 top
R83 "Res1" 0402R 1268.951,1133.65 r90 top
R85 "Res1" 0402R 1213.071,1119.045 r0 top
R86 "Res1" 0402R 1201.92,1118.791 r0 top
R90 "Res1" 0402R 1283.556,1087.681 r270 top
R91 "Res1" 0402R 1281.651,1087.701 r90 top
R95 "Res1" 0402R 1214.468,1121.521 r90 top
R96 "Res1" 0402R 1200.246,1121.453 r90 top
R98 "Res1" 0402R 1281.778,1083.485 r0 top
R99 "Res1" 0402R 1281.778,1081.58 r0 top
R100 "Res1" 0402R 1255.489,1088.679 r180 top
R103 "Res1" 0402R 1232.776,1106.98 r0 top
R105 "Res1" 0402R 1232.756,1103.17 r180 top
R106 "Res1" 0402R 1232.776,1105.075 r0 top
R109 "Res1" 0402R 1279.111,1082.723 r90 top
R111 "Res1" 0402R 1214.872,1128.824 r180 top
R112 "Res1" 0402R 1200.953,1128.824 r0 top
R114 "Res1" 0402R 1205.705,1091.745 r270 top
R117 "Res1" 0402R 1209.261,1091.745 r270 top
R128 "Res1" 0603R 1211.674,1131.021 r270 top
R129 "Res1" 0603R 1231.193,1132.761 r180 top
R130 "Res1" 0603R 1235.13,1132.761 r0 top
R131 "Res1" 0603R 1218.62,1132.761 r0 top
R132 "Res1" 0603R 1214.683,1132.761 r0 top
R133 "Res1" 0603R 1195.519,1132.761 r180 top
R134 "Res1" 0603R 1199.443,1132.761 r0 top
R139 "Res1" 0402R 1259.639,1137.587 r90 top
R142 "Res1" 0402R 1258.283,1129.967 r90 top
R158 "Res1" 0402R 1261.839,1137.587 r90 top
R161 "Res1" 0402R 1263.744,1137.714 r90 top
R180 "Res1" 0402R 1232.756,1101.265 r180 top
R181 "Res1" 0402R 1214.893,1130.729 r0 top
R182 "Res1" 0402R 1200.932,1130.729 r180 top
R183 "Res1" 0402R 1212.817,1121.521 r90 top
R184 "Res1" 0402R 1202.149,1121.433 r270 top
R189 "Res1" 0402R 1218.024,1116.632 r180 top
R190 "Res1" 0402R 1201.29,1114.473 r0 top
U1 "HM1521-M" HM1521-M 1250.495,1118.94 r90 top
U6 "REG1117-2v5" AZ1117H-2.5TRE1-SOT223 1232.756,1086.1 r90 top
U7 "REG1117-3V3" AZ1117H-3.3TRE1-SOT223 1219.04,1086.1 r90 top
U10 "REG1117-3V3" AZ1117H-3.3TRE1-SOT223 1187.925,1125.903 r270 top
U43 "NE4558D" SOP8 1207.502,1121.458 r0 top
U202 "S25FL064" SO16 1280.762,1140.381 r0 top
U204 "TSSOP66" TSOP66 1269.586,1089.2 r0 top
U206 "LSP3100" LSP3100C 1206.34,1088.184 r0 top
U208 "MAX809" SGM809SXN3(SOT23) 1249.826,1145.842 r0 top
Y1 "XTAL" 49UC 1244.44,1126.665 r90 top

## Footprints (in the part's own frame and the unit in brackets; to place one, negate y for a bottom-side part, rotate by r counter-clockwise, add the part's x,y. Pads: shape width x height; smd on the part's side, far side on the other; paste and mask are expansions set on the pad)
2SB1197K-SOT23 [mm]
  rect 1.4x1 smd: 1(-1.1,1.016) 2(-1.1,-1.016) 3(1.1,0)
  silkscreen extent -0.7,-1.83 0.7,1.83
49UC [mm]
  rect 5.5x2 smd: 1(-4.69,0) 2(4.69,0)
  silkscreen extent -5.84,-2.42 5.84,2.42
0402C [mm]
  rect 0.9x0.8 smd: 1(-0.66,0) 2(0.64,0)
  silkscreen extent -1.35,-0.66 1.35,0.66
0402L [mm]
  rect 0.9x0.8 smd: 1(-0.66,0) 2(0.64,0)
  silkscreen extent -1.49,-0.66 1.49,0.66
0402R [mm]
  rect 0.9x0.8 smd: 1(-0.66,0) 2(0.64,0)
  silkscreen extent -1.35,-0.66 1.35,0.66
0603C [mm]
  rect 1.1x1 smd: 1(-0.85,0) 2(0.85,0)
  silkscreen extent -1.65,-0.76 1.65,0.76
0603R [mm]
  rect 1.1x1 smd: 1(-0.85,0) 2(0.85,0)
  silkscreen extent -1.65,-0.76 1.65,0.76
0805C [mm]
  rect 1.3x1.2 smd: 1(-0.95,0) 2(0.95,0)
  silkscreen extent -1.85,-0.86 1.85,0.86
0805L [mm]
  rect 1.3x1.2 smd: 1(-0.95,0) 2(0.95,0)
  silkscreen extent -2.08,-0.86 2.08,0.86
AVLP-23-6A-0A102 [mm]
  round 2.4 hole 2: 1(0,7.5) 2(-7.5,7.5) 4(-14,7.5) 5(-21.5,7.5) 7(-28,7.5) 8(-35.5,7.5)
  round 2.8 hole 2.4: 3(-7.5,0) 6(-21.5,0) 9(-35.5,0)
  rect 2x3 hole 2 square: Hole(-38.55,3.75) Hole(3.05,3.75)
  silkscreen extent -41,-9.26 5.54,11.8
AZ1117H-2.5TRE1-SOT223 [mm]
  rect 2.2x1.2 smd: 1(-3.1,2.3) 2(-3.1,0) 3(-3.1,-2.3)
  rect 2.2x3.5 smd: 4(3.1,0)
  silkscreen extent -1.53,-3.35 1.6,3.35
AZ1117H-3.3TRE1-SOT223 [mm] "SOT223, 4-Leads, Body 6.50x7.00mm (avg), Pitch 2.30mm, IPC Medium Density"
  rect 2.2x1.2 smd: 1(-3.1,2.3) 2(-3.1,0) 3(-3.1,-2.3)
  rect 2.2x3.5 smd: 4(3.1,0)
  silkscreen extent -1.53,-3.35 1.6,3.35
BAT54S(SOT23) [mm]
  rect 1.4x1 smd: 1(-1.1,1.016) 2(-1.1,-1.016) 3(1.1,0)
  silkscreen extent -0.7,-1.83 0.7,1.83
DC插座 [mm]
  oval 1.778x3 hole 1 slot 1.6 at 90 deg: 1(0,0) 2(-4.9,0.025)
  oval 3x1.778 hole 1 slot 1.6 at 0 deg: 3(-2.6,-2.8)
  silkscreen extent -10.9,-2.79 0,2.54
HM1521-M [mm]
  oval 1.6x0.18 smd: 1(-8,-6.5) 2(-8,-6.9) 3(-8,-7.3) 4(-8,-7.7) 5(-8,-8.1) 6(-8,-8.5) 7(-8,-8.9) 8(-8,-9.3) 9(-8,-9.7) 10(-8,-10.1) 11(-8,-10.5) 12(-8,-10.9) 13(-8,-11.3) 14(-8,-11.7) 15(-8,-12.1) 16(-8,-12.5) 17(-8,-12.9) 18(-8,-13.3) 19(-8,-13.7) 20(-8,-14.1) 21(-8,-14.5) 22(-8,-14.9) 23(-8,-15.3) 24(-8,-15.7) 25(-8,-16.1) 26(-8,-16.5) 27(-8,-16.9) 28(-8,-17.3) 29(-8,-17.7) 30(-8,-18.1) 31(-8,-18.5) 32(-8,-18.9) 65(7.45,-18.9) 66(7.45,-18.5) 67(7.45,-18.1) 68(7.45,-17.7) 69(7.45,-17.3) 70(7.45,-16.9) 71(7.45,-16.5) 72(7.45,-16.1) 73(7.45,-15.7) 74(7.45,-15.3) 75(7.45,-14.9) 76(7.45,-14.5) 77(7.45,-14.1) 78(7.45,-13.7) 79(7.45,-13.3) 80(7.45,-12.9) 81(7.45,-12.5) 82(7.45,-12.1) 83(7.45,-11.7) 84(7.45,-11.3) 85(7.45,-10.9) 86(7.45,-10.5) 87(7.45,-10.1) 88(7.45,-9.7) 89(7.45,-9.3) 90(7.45,-8.9) 91(7.45,-8.5) 92(7.45,-8.1) 93(7.45,-7.7) 94(7.45,-7.3) 95(7.45,-6.9) 96(7.45,-6.5)
  oval 0.18x1.6 smd: 33(-6.475,-20.425) 34(-6.075,-20.425) 35(-5.675,-20.425) 36(-5.275,-20.425) 37(-4.875,-20.425) 38(-4.475,-20.425) 39(-4.075,-20.425) 40(-3.675,-20.425) 41(-3.275,-20.425) 42(-2.875,-20.425) 43(-2.475,-20.425) 44(-2.075,-20.425) 45(-1.675,-20.425) 46(-1.275,-20.425) 47(-0.875,-20.425) 48(-0.475,-20.425) 49(-0.075,-20.425) 50(0.325,-20.425) 51(0.725,-20.425) 52(1.125,-20.425) 53(1.525,-20.425) 54(1.925,-20.425) 55(2.325,-20.425) 56(2.725,-20.425) 57(3.125,-20.425) 58(3.525,-20.425) 59(3.925,-20.425) 60(4.325,-20.425) 61(4.725,-20.425) 62(5.125,-20.425) 63(5.525,-20.425) 64(5.925,-20.425) 97(5.925,-4.975) 98(5.525,-4.975) 99(5.125,-4.975) 100(4.725,-4.975) 101(4.325,-4.975) 102(3.925,-4.975) 103(3.525,-4.975) 104(3.125,-4.975) 105(2.725,-4.975) 106(2.325,-4.975) 107(1.925,-4.975) 108(1.525,-4.975) 109(1.125,-4.975) 110(0.725,-4.975) 111(0.325,-4.975) 112(-0.075,-4.975) 113(-0.475,-4.975) 114(-0.875,-4.975) 115(-1.275,-4.975) 116(-1.675,-4.975) 117(-2.075,-4.975) 118(-2.475,-4.975) 119(-2.875,-4.975) 120(-3.275,-4.975) 121(-3.675,-4.975) 122(-4.075,-4.975) 123(-4.475,-4.975) 124(-4.875,-4.975) 125(-5.275,-4.975) 126(-5.675,-4.975) 127(-6.075,-4.975) 128(-6.475,-4.975)
  silkscreen extent -8.12,-19.3 6.33,-5.68
LSP3100C [mm]
  rect 1x0.6 smd: 1(-1.175,0.95) 2(-1.175,0) 3(-1.175,-0.95) 4(1.175,-0.95) 5(1.175,0.95)
  silkscreen extent -1.27,-1.5 0.41,1.78
MARK [mm]
  round 1 all layers, no hole: 1(0,0)
PIO43-2R2MB [mm]
  rect 1.8x4.6 smd: 1(-1.725,0) 2(1.725,0)
  silkscreen extent -3.05,-2.67 3.05,2.67
PMBT3904-SOT23 [mm]
  rect 1.4x1 smd: 1(-1.1,1.016) 2(-1.1,-1.016) 3(1.1,0)
  silkscreen extent -0.7,-1.83 0.7,1.83
Screw-R7.8 [mm]
  round 7.882 hole 4.102 unplated: MI(-0.056,0.234)
SD1C107M05011BB [mm]
  rect 1.4x1.7 hole 0.9: 1(-1.27,0)
  oval 1.4x1.7 hole 0.9: 2(1.27,0)
  silkscreen extent -2.82,-2.82 2.82,2.82
SD1C227M6L011BB [mm]
  rect 1.5x1.8 hole 1: 1(-1.27,0)
  oval 1.5x1.8 hole 1: 2(1.27,0)
  silkscreen extent -3.2,-3.2 3.2,3.2
SGM809SXN3(SOT23) [mm]
  rect 1.4x1 smd: 1(-1.1,1.016) 2(-1.1,-1.016) 3(1.1,0)
  silkscreen extent -0.7,-1.83 0.7,1.83
SO16 [mm] "SOP, 16-Leads, Body 10.30x7.50mm, Pitch 1.27mm, IPC Medium Density"
  rect 2.2x0.6 smd: 1(-4.6,4.445)
  oval 2.2x0.6 smd: 2(-4.6,3.175) 3(-4.6,1.905) 4(-4.6,0.635) 5(-4.6,-0.635) 6(-4.6,-1.905) 7(-4.6,-3.175) 8(-4.6,-4.445) 9(4.6,-4.445) 10(4.6,-3.175) 11(4.6,-1.905) 12(4.6,-0.635) 13(4.6,0.635) 14(4.6,1.905) 15(4.6,3.175) 16(4.6,4.445)
  silkscreen extent -2.66,-5.08 2.67,5.08
SOP8 [mm]
  rect 2.2x0.6 smd: 1(-2.6,1.905)
  oval 2.2x0.6 smd: 2(-2.6,0.635) 3(-2.6,-0.635) 4(-2.6,-1.905) 5(2.6,-1.905) 6(2.6,-0.635) 7(2.6,0.635) 8(2.6,1.905)
  silkscreen extent -1.16,-2.54 1.21,2.54
TJC3-4P [mm]
  round 1.7 hole 1.3: 1(7.5,0) 2(5,0) 3(2.5,0) 4(0,0)
  silkscreen extent -2.55,-3.81 10.3,2.95
TSOP66 [mm]
  oval 1.25x0.4 smd: 1(-5.775,10.4) 2(-5.775,9.75) 3(-5.775,9.1) 4(-5.775,8.45) 5(-5.775,7.8) 6(-5.775,7.15) 7(-5.775,6.5) 8(-5.775,5.85) 9(-5.775,5.2) 10(-5.775,4.55) 11(-5.775,3.9) 12(-5.775,3.25) 13(-5.775,2.6) 14(-5.775,1.95) 15(-5.775,1.3) 16(-5.775,0.65) 17(-5.775,0) 18(-5.775,-0.65) 19(-5.775,-1.3) 20(-5.775,-1.95) 21(-5.775,-2.6) 22(-5.775,-3.25) 23(-5.775,-3.9) 24(-5.775,-4.55) 25(-5.775,-5.2) 26(-5.775,-5.85) 27(-5.775,-6.5) 28(-5.775,-7.15) 29(-5.775,-7.8) 30(-5.775,-8.45) 31(-5.775,-9.1) 32(-5.775,-9.75) 33(-5.775,-10.4) 34(5.775,-10.4) 35(5.775,-9.75) 36(5.775,-9.1) 37(5.775,-8.45) 38(5.775,-7.8) 39(5.775,-7.15) 40(5.775,-6.5) 41(5.775,-5.85) 42(5.775,-5.2) 43(5.775,-4.55) 44(5.775,-3.9) 45(5.775,-3.25) 46(5.775,-2.6) 47(5.775,-1.95) 48(5.775,-1.3) 49(5.775,-0.65) 50(5.775,0) 51(5.775,0.65) 52(5.775,1.3) 53(5.775,1.95) 54(5.775,2.6) 55(5.775,3.25) 56(5.775,3.9) 57(5.775,4.55) 58(5.775,5.2) 59(5.775,5.85) 60(5.775,6.5) 61(5.775,7.15) 62(5.775,7.8) 63(5.775,8.45) 64(5.775,9.1) 65(5.775,9.75) 66(5.775,10.4)
  silkscreen extent -5.84,-11.15 4.75,11.17

## Part data
C5 C6 C11 C13 C14 C15 C17 C18 C24 C25 C26 C27 C28 C30 C31 C32 C33 C35 C37 C38 C40 C41 C42 C43 C45 C46 C47 C49 C50 C53 C54 C55 C56 C57 C58 C59 C61 C63 C64 C65 C67 C70 C71 C72 C73 C74 C75 C76 C78 C83 C84 C85 C86 C87 C88 C89 C90 C91 C92 C94 C95 C101 C105 C107 C116 C117 C251 C270 C271 C272 C273 C343 C1328 C1340 C1341: "Capacitor"
C29 C34 C60 C98 C99 C100 C102 C104 C275 C276 C1327 C1333 C1334 CE1 CE2 CE5: library part Cap2, "Capacitor"
J8 J11: library part "Header 4", "Header, 4-Pin"
J9 U208: library part "Header 3", "Header, 3-Pin"
J10: library part "Header 9", "Header, 9-Pin"
M1 M2 M3: library part 1PIN
Q24: "PNP Bipolar Transistor"
Q26: "NPN Bipolar Transistor"
R24 R25 R27 R28 R29 R35 R37 R47 R48 R54 R55 R56 R57 R59 R60 R62 R63 R64 R65 R66 R67 R68 R69 R70 R71 R72 R73 R74 R75 R76 R77 R78 R79 R80 R81 R82 R83 R85 R86 R90 R91 R95 R96 R98 R99 R100 R103 R105 R106 R109 R111 R112 R114 R117 R128 R129 R130 R131 R132 R133 R134 R139 R142 R158 R161 R180 R181 R182 R183 R184 R189 R190: "Resistor"
U1: library part LQFP128
U6 U7 U10 U206: library part "Header 5", "Header, 5-Pin"
U43: library part "Op Amp"
U202: library part "Header 8X2A", "Header, 8-Pin, Dual row"
Y1: "Crystal Oscillator"

## Free pads (board coordinates)
  rect 1x1 on Top Solder: 2(1187.925,1137.968)
  round 0.5 smd: TP1(1208.905,1127.63) TP1(1215.23,1125.42) TP3(1257.663,1147.33)

## Via types
v1: diameter 0.635, hole 0.305, Top Layer to Bottom Layer, 379 vias

## Nets (pads, with @x,y where several pads share a name; then routed paths per layer and width w, separated by ;. In a path a pad name is that pad's centre, name@x,y a point inside that pad or via, vN(x,y) a via of type N, cw(c..) or ccw(c..) an arc to the next point about the centre after c; other vN are vias at no path point)
1P2AO: C273.2 R82.2 U1.77 | length 8.8
  Top Layer w0.152: U1.77@1264.595,1126.39 1264.595,1131.58 1265.141,1132.126 C273.2@1265.141,1133.01 R82.2@1267.046,1133.01
5V: C65.1 C72.1 C99.1 C100.1 C102.1 C107.2 C343.1 D10.2 D12.2 D13.2 D14.2 FB3.1 J8.1 J9.1 J11.2 J11.3 L10.1 pad.TP3 R103.1 R128.1 R180.2 U6.3 U7.3 U10.3 | length 334
  Top Layer w0.2: L10.1@1257.049,1146.723 pad.TP3@1257.673,1147.32
  Top Layer w0.508: J9.1@1181.234,1140.604 1185.288,1140.604 1187.925,1137.968 1187.925,1137.206 1185.994,1135.276 C72.1@1185.994,1131.974 1185.994,1130.972 1185.625,1130.602 U10.3@1185.625,1128.953 ; D14.2@1196.934,1130.602 1198.363,1130.602 ; v1(1198.363,1130.077) 1198.363,1130.602 ; v1(1198.363,1131.127) 1198.363,1130.602 ; v1(1211.149,1134.031) 1211.674,1134.031 ; R128.1@1211.674,1131.871 1211.674,1134.031 ; v1(1212.199,1134.031) 1211.674,1134.031 ; C99.1@1221.34,1075.484 U7.3@1221.34,1082.975 ; v1(1223.255,1135.937) 1223.78,1135.937 ; D13.2@1223.78,1133.777 1223.78,1135.937 ; v1(1224.305,1135.937) 1223.78,1135.937 ; v1(1225.586,1130.221) 1226.111,1130.221 ; J8.1@1225.644,1108.885 C107.2@1232.116,1108.885 ; D12.2@1226.111,1131.745 1226.111,1130.221 ; v1(1226.636,1130.221) 1226.111,1130.221 ; v1(1230.724,1101.519) 1230.978,1101.265 R180.2@1232.116,1101.265 ; v1(1230.724,1107.615) 1231.105,1107.996 1232.116,1107.996 R103.1@1232.116,1106.98 ; 1232.116,1108.06 C107.2@1232.116,1108.885 ; v1(1232.121,1110.282) 1232.121,1108.89 C107.2@1232.116,1108.885 ; C107.2@1232.184,1108.885 C107.2@1232.116,1108.885 ; C100.1@1235.056,1075.105 U6.3@1235.056,1083.229 ; v1(1237.184,1134.285) v1(1238.234,1134.285) 1238.725,1134.285 1239.233,1133.777 D10.2@1240.206,1133.777 ; v1(1255.362,1144.318) v1(1255.362,1145.334) 1255.362,1146.223 1255.9,1146.761 1256.856,1146.761 L10.1@1257.013,1146.604
  Top Layer w1.016: FB3.1@1204.44,1072.436 v1(1204.44,1075.23) v1(1204.44,1076.246)
  Bottom Layer w0.508: J11.2@1182.591,1092.375 1188.901,1092.375 ; J11.3@1182.591,1094.875 1188.901,1094.875 1188.941,1094.915 ; v1(1198.363,1130.077) v1(1198.363,1131.127) 1198.363,1132.507 ; v1(1211.149,1134.031) v1(1212.199,1134.031) ; 1211.674,1132.507 1211.674,1134.031 ; 1221.326,1079.419 1221.327,1079.04 C99.1@1221.34,1075.484 ; v1(1223.255,1135.937) 1223.78,1135.937 ; 1223.993,1132.507 1223.78,1132.72 1223.78,1135.937 ; v1(1224.305,1135.937) 1223.78,1135.937 ; v1(1225.586,1130.221) 1226.111,1130.221 ; 1226.111,1132.507 1226.111,1130.221 ; v1(1226.636,1130.221) 1226.111,1130.221 ; v1(1230.724,1101.519) v1(1230.724,1107.615) ; 1231.105,1132.507 1231.105,1117.775 1230.089,1116.759 1230.089,1112.314 v1(1232.121,1110.282) ; 1235.042,1079.04 C100.1@1235.056,1075.105 ; v1(1237.184,1134.285) 1237.709,1134.285 ; v1(1238.234,1134.285) 1237.709,1134.285 ; 1238.471,1132.507 1237.709,1133.269 1237.709,1134.285
  Bottom Layer w1.016: v1(1204.44,1075.23) v1(1204.44,1076.246) 1204.44,1079.04
  Bottom Layer w2.032: 1235.042,1079.04 1221.327,1079.04 1204.44,1079.04 1195.799,1079.04 1188.941,1085.898 1188.941,1094.915 1188.941,1100.122 1185.131,1103.932 1185.131,1136.717 1181.244,1140.604 1191.257,1140.604 1193.386,1138.476 1193.386,1134.793 1195.672,1132.507 1198.363,1132.507 1211.674,1132.507 1223.993,1132.507 1226.111,1132.507 1231.105,1132.507 1238.471,1132.507 1240.503,1134.539 1240.503,1139.746 1245.583,1144.826 1255.362,1144.826
5VA: C60.1 C63.2 pad.TP1@1208.905,1127.63 R128.2 U43.8 | length 13.2
  Top Layer w0.2: 1208.085,1128.339 pad.TP1@1208.847,1127.577
  Top Layer w0.508: U43.8@1210.102,1123.363 1210.102,1124.506 1209.34,1125.268 C63.2@1207.993,1125.268 1207.991,1125.268 C60.1@1207.991,1130.171 R128.2@1211.674,1130.171
-10V: C29.2 C71.1 C74.1 D9.1 R47.2 U43.4 | length 32.2
  Top Layer w0.508: D9.1@1196.595,1092.824 C71.1@1196.595,1095.296 C74.1@1196.595,1097.582 1196.595,1098.632 1202.784,1104.821 1202.784,1105.075 C29.2@1202.784,1107.361 ; 1202.784,1104.44 1202.911,1104.313 1204.79,1104.313 ; v1(1204.902,1117.432) U43.4@1204.902,1119.553
  Bottom Layer w0.508: C29.2@1202.784,1107.361 1204.902,1109.479 v1(1204.902,1117.432)
/SYS_RST: C64.2 R63.2 U1.100 | length 24.4
  Top Layer w0.152: C64.2@1250.026,1140.762 1250.026,1140.125 1249.139,1139.238 1249.139,1125.903 1249.52,1125.522 1252.441,1125.522 1254.298,1123.665 U1.100@1255.47,1123.665
  Top Layer w0.508: C64.2@1250.026,1140.762 R63.2@1250.026,1142.667
A3V3: C5.2 C54.2 C57.2 C58.2 C61.2 C1334.1 L17.2 R81.1 U1.1 U1.97 U1.102 U1.107 U1.108 U1.113 U1.114 | length 88.9
  Top Layer w0.152: v1(1253.076,1123.49) 1253.701,1122.865 U1.102@1255.47,1122.865 ; 1254.575,1127.911 1254.575,1126.766 1253.965,1126.156 1253.965,1125.395 1254.495,1124.865 U1.97@1255.47,1124.865 ; 1254.981,1109.901 1255.362,1109.52 1256.505,1109.52 1256.995,1110.01 U1.1@1256.995,1110.94 ; U1.114@1255.47,1118.065 1254.509,1118.065 1253.457,1117.013 v1(1252.822,1117.013) 1253.076,1117.267 1253.203,1117.267 1254.401,1118.465 U1.113@1255.47,1118.465 ; U1.108@1255.47,1120.465 1254.369,1120.465 1253.203,1119.299 v1(1252.822,1119.299) 1254.388,1120.865 U1.107@1255.47,1120.865
  Top Layer w0.508: R81.1@1251.361,1107.552 1253.584,1107.552 1253.584,1108.504 1254.981,1109.901 v1(1255.616,1110.536) ; C58.2@1251.502,1124.748 C58.2@1251.57,1124.748 ; C54.2@1251.556,1117.013 v1(1252.822,1117.013) ; C57.2@1251.556,1118.918 1252.441,1118.918 v1(1252.822,1119.299) ; C58.2@1251.556,1124.633 1252.314,1124.633 1252.695,1124.252 1252.695,1123.871 v1(1253.076,1123.49) ; C61.2@1251.556,1128.443 1252.695,1128.443 1253.227,1127.911 1253.862,1127.911 1254.575,1127.911 1255.489,1128.824 ; L17.2@1255.108,1140 1255.108,1129.205 1255.489,1128.824 ; v1(1255.997,1127.173) v1(1255.997,1128.316) 1255.489,1128.824
  Bottom Layer w0.508: v1(1252.822,1117.013) 1258.41,1117.013 ; v1(1252.822,1119.299) 1254.092,1120.569 1258.41,1120.569 ; v1(1253.076,1123.49) 1258.41,1123.49 ; v1(1255.616,1110.536) 1255.616,1111.171 1258.41,1113.965 1258.41,1117.013 ; v1(1255.997,1128.316) v1(1255.997,1127.173) 1258.41,1124.76 1258.41,1123.49 ; 1258.41,1117.013 1258.41,1120.569 ; 1258.41,1120.569 1258.41,1123.49
A3V3_AUDIO: C70.2 CE5.1 R81.2 U1.121 | length 21.6
  Top Layer w0.152: v1(1252.466,1114.244) 1253.482,1114.244 1254.503,1115.265 U1.121@1255.47,1115.265
  Top Layer w0.508: R81.2@1249.964,1107.551 1248.694,1107.551 1247.615,1106.472 CE5.1@1246.599,1106.472 1246.599,1108.123 1248.123,1109.647 v1(1252.949,1109.647) ; C70.2@1251.556,1114.219 1251.582,1114.244 v1(1252.466,1114.244)
  Bottom Layer w0.508: v1(1252.466,1114.244) 1252.949,1113.762 v1(1252.949,1109.647)
A_L: R189.1 U1.118 | length 40.3
  Top Layer w0.152: 1243.449,1113.355 1244.694,1114.6 1247.742,1114.6 1248.504,1115.362 1253.457,1115.362 1254.56,1116.465 U1.118@1255.47,1116.465
  Top Layer w0.508: R189.1@1218.595,1116.632 R189.1@1218.684,1116.632 1220.818,1116.632 1221.707,1117.521 1233.01,1117.521 1237.175,1113.355 1243.449,1113.355
A_R: R190.2 U1.120 | length 60
  Top Layer w0.152: 1234.572,1112.998 1243.852,1113.004 1245.067,1114.219 1247.869,1114.219 1248.631,1114.981 1253.711,1114.981 1254.395,1115.665 U1.120@1255.47,1115.665
  Top Layer w0.508: R190.2@1201.93,1114.473 1201.93,1113.549 1203.8,1111.679 1219.929,1111.679 1225.059,1116.81 1230.927,1116.81 1234.572,1113.165
AUL: J10.5 R111.1 R132.2 R181.2 | length 14.2
  Top Layer w0.508: R111.1@1215.533,1128.824 R181.2@1215.533,1130.729 R132.2@1215.533,1132.761 1215.533,1135.985 1219.102,1139.554 J10.5@1221.094,1139.554
AUR: J10.2 R112.1 R134.2 R182.2 | length 14.4
  Top Layer w0.508: R112.1@1200.293,1128.824 R182.2@1200.293,1130.729 R134.2@1200.293,1132.761 1200.293,1134.207 1205.64,1139.554 J10.2@1207.094,1139.554
CVBS: C25.1 D10.3 J10.8 L1.2 R130.2 | length 14.4
  Top Layer w0.508: J10.8@1235.094,1139.554 1235.98,1138.668 R130.2@1235.98,1132.761 D10.3@1238.006,1132.761 C25.1@1238.006,1129.84 L1.2@1238.006,1127.554
D1V2: C38.2 C41.2 C42.2 C43.2 C55.2 C78.1 C272.2 C275.1 L38.2 R82.1 R114.1 U1.15 U1.46 U1.64 U1.83 U1.127 | length 162
  Top Layer w0.152: v1(1253.838,1111.298) 1253.838,1112.187 1254.516,1112.865 U1.127@1255.47,1112.865 ; U1.83@1262.195,1126.39 1262.195,1127.529 1262.347,1127.681 v1(1262.347,1128.062) ; v1(1262.474,1108.885) 1262.474,1109.393 1262.595,1109.514 U1.15@1262.595,1110.94 ; U1.46@1270.92,1117.665 1272.744,1117.665 1272.761,1117.648 v1(1273.315,1117.648) ; U1.64@1270.92,1124.865 1271.977,1124.865 1272.126,1125.014 1272.126,1125.522 v1(1271.745,1125.903)
  Top Layer w0.508: L38.2@1200.625,1090.684 1200.625,1094.661 1201.387,1095.423 C275.1@1206.594,1095.423 ; R114.1@1205.705,1092.405 1206.594,1092.405 ; C272.2@1207.515,1092.405 1206.594,1092.405 ; v1(1238.344,1097.074) 1237.455,1097.074 1235.296,1099.233 1214.341,1099.233 1210.531,1095.423 C275.1@1206.594,1095.423 ; C41.2@1251.488,1111.298 C41.2@1251.556,1111.298 v1(1253.838,1111.298) ; C38.2@1261.966,1107.62 1261.966,1108.25 1262.474,1108.758 v1(1262.474,1108.885) ; C55.2@1262.093,1129.327 1262.093,1128.316 v1(1262.347,1128.062) ; R82.1@1267.046,1134.222 R82.1@1267.046,1134.31 v1(1267.046,1135.555) ; v1(1271.745,1125.903) 1273.523,1127.681 ; v1(1273.315,1117.648) C42.2@1274.87,1117.648 ; v1(1273.523,1129.078) 1273.523,1127.681 ; C43.2@1274.788,1127.681 1273.523,1127.681 ; 1206.594,1092.405 C275.1@1206.594,1095.423
  Top Layer w1.016: v1(1238.344,1097.074) v1(1239.36,1097.074)
  Bottom Layer w0.508: 1239.741,1097.074 1250.028,1097.074 1255.489,1102.535 1255.489,1108.631 ; v1(1253.838,1111.298) 1253.838,1110.282 1255.489,1108.631 ; v1(1262.347,1128.062) 1262.347,1125.141 1263.998,1123.49 1266.919,1123.49 1268.189,1122.22 ; v1(1262.474,1108.885) 1262.474,1113.584 ; v1(1267.046,1135.555) 1270.348,1135.555 1273.523,1132.38 v1(1273.523,1129.078) ; v1(1271.745,1125.903) 1268.189,1122.347 1268.189,1122.22 ; v1(1273.315,1117.648) 1268.189,1117.648 ; 1255.489,1108.631 1260.442,1113.584 1262.474,1113.584 ; 1262.474,1113.584 1266.665,1113.584 1268.189,1115.108 1268.189,1117.648 ; 1268.189,1117.648 1268.189,1122.22
  Bottom Layer w1.016: v1(1238.344,1097.074) v1(1239.36,1097.074)
D2V5: C11.2 C31.2 C32.2 C33.2 C53.2 C67.2 C73.2 C1327.1 C1328.1 L18.2 U1.8 U1.23 U1.34 U1.42 U1.53 U6.2 U6.4 | length 125.4
  Top Layer w0.152: C11.2@1259.299,1107.747 1259.299,1109.012 1259.795,1109.508 U1.8@1259.795,1110.94 ; U1.23@1265.795,1110.94 1265.825,1110.909 1265.825,1108.556 v1(1265.826,1108.555) ; U1.34@1270.92,1112.865 1272.21,1112.865 v1(1273.015,1112.06) ; U1.42@1270.92,1116.065 1272.947,1116.065 1273.142,1115.87 v1(1273.523,1115.87) ; U1.53@1270.92,1120.465 1274.008,1120.465 1274.238,1120.696 C53.2@1275.24,1120.696
  Top Layer w0.508: U6.2@1232.756,1083.229 C1327.1@1232.756,1095.169 1232.769,1095.155 C1328.1@1237.455,1095.155 v1(1241.138,1095.155) ; L18.2@1255.23,1086.152 1255.235,1086.157 v1(1255.235,1087.422) ; C67.2@1256.886,1106.152 1258.029,1106.152 ; v1(1258.41,1104.948) 1258.029,1105.329 1258.029,1106.152 ; C11.2@1259.045,1107.62 1258.414,1107.62 1258.029,1107.234 1258.029,1106.152 ; C31.2@1265.776,1107.47 C31.2@1265.776,1107.62 ; C31.2@1265.795,1107.62 1265.826,1107.651 v1(1265.826,1108.555) ; v1(1273.015,1112.06) C32.2@1274.788,1112.06 ; v1(1273.523,1115.87) 1273.522,1115.871 v1(1273.523,1115.87) 1273.777,1115.616 C33.2@1274.87,1115.616 C33.2@1274.915,1115.616 ; C53.2@1275.24,1120.696 1275.24,1121.712 ; C73.2@1275.24,1122.855 1275.24,1121.712 ; v1(1279.619,1121.077) 1278.984,1121.712 1275.24,1121.712
  Top Layer w1.016: v1(1241.138,1095.155) v1(1242.154,1095.155)
  Bottom Layer w0.508: v1(1242.154,1095.155) 1253.33,1095.155 ; v1(1255.235,1087.422) 1253.838,1087.422 1253.33,1087.93 1253.33,1095.155 ; v1(1258.41,1104.948) 1258.537,1104.948 1259.286,1104.198 ; v1(1265.826,1108.555) 1265.826,1108.028 1265.795,1107.996 ; v1(1273.015,1112.06) 1273.777,1112.06 1274.666,1111.171 1274.793,1111.171 ; v1(1273.523,1115.87) 1276.507,1112.885 ; v1(1279.619,1121.077) 1279.619,1115.997 1276.507,1112.885 ; 1253.33,1095.155 1259.299,1101.124 1259.299,1104.059 1260.429,1105.19 1263.236,1107.996 1265.795,1107.996 ; 1265.795,1107.996 1265.795,1107.869 1271.491,1107.869 1274.793,1111.171 ; 1274.793,1111.171 1276.507,1112.885
  Bottom Layer w1.016: v1(1241.138,1095.155) v1(1242.154,1095.155)